# Altium PCB Surf_RF_transceiver.PcbDoc
Units mil, origin at the board's own origin, x right, y up, seen from the top; angles counter-clockwise.
Board outline 1968.5 x 1968.5 mil, 2 copper layers (Top Layer, Bottom Layer), stack 65.792 mil thick; 76 components, 52 nets, 286 pads, 87 vias.
Unrouted connection lines stored in the file: 15.
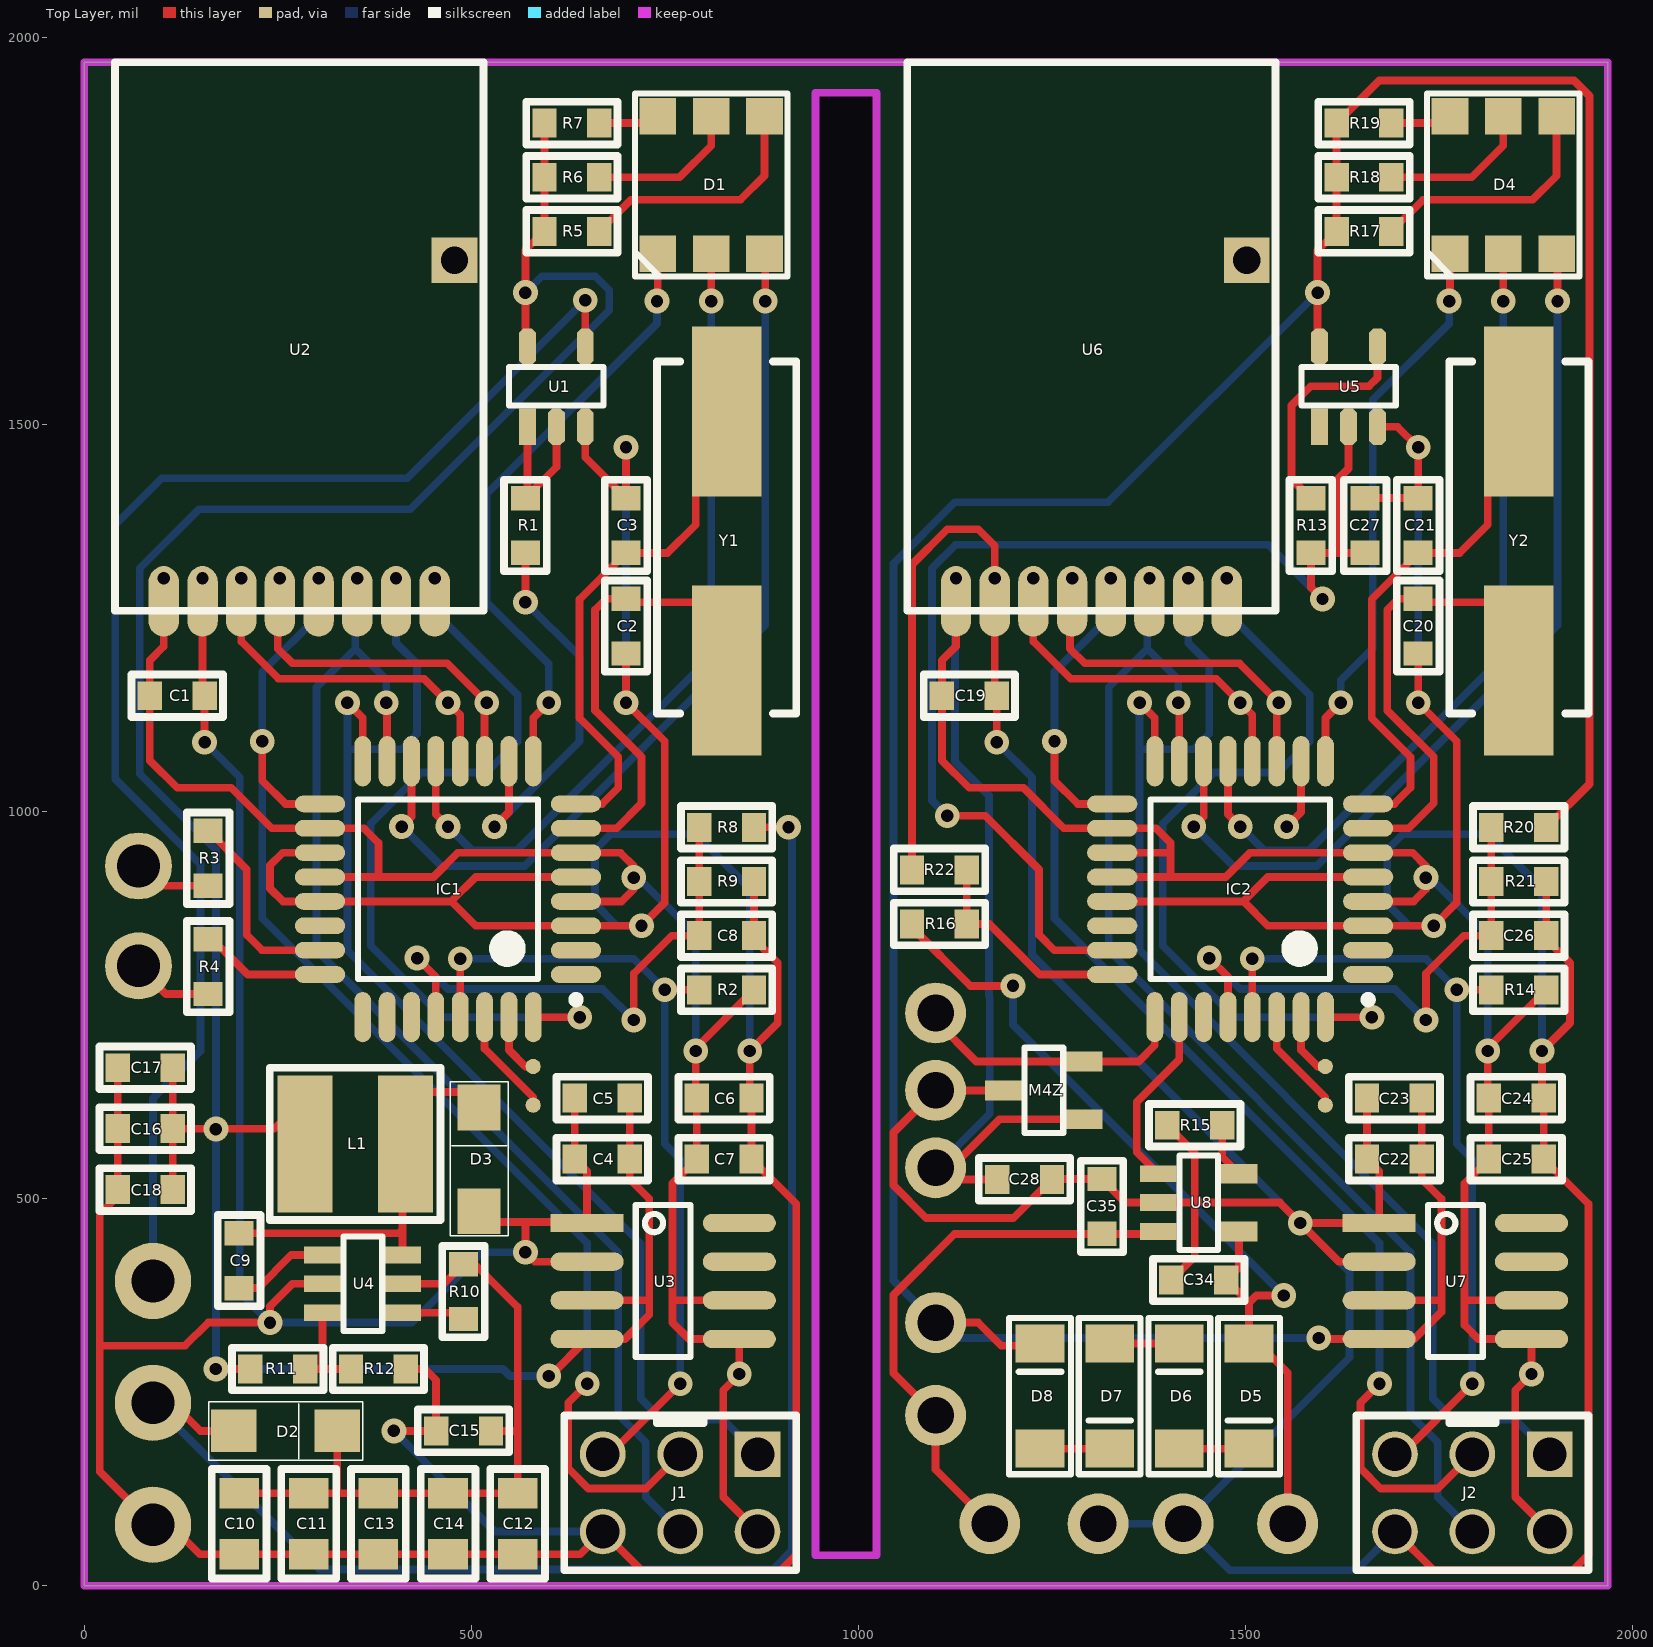
[diagram p0: Top Layer view]
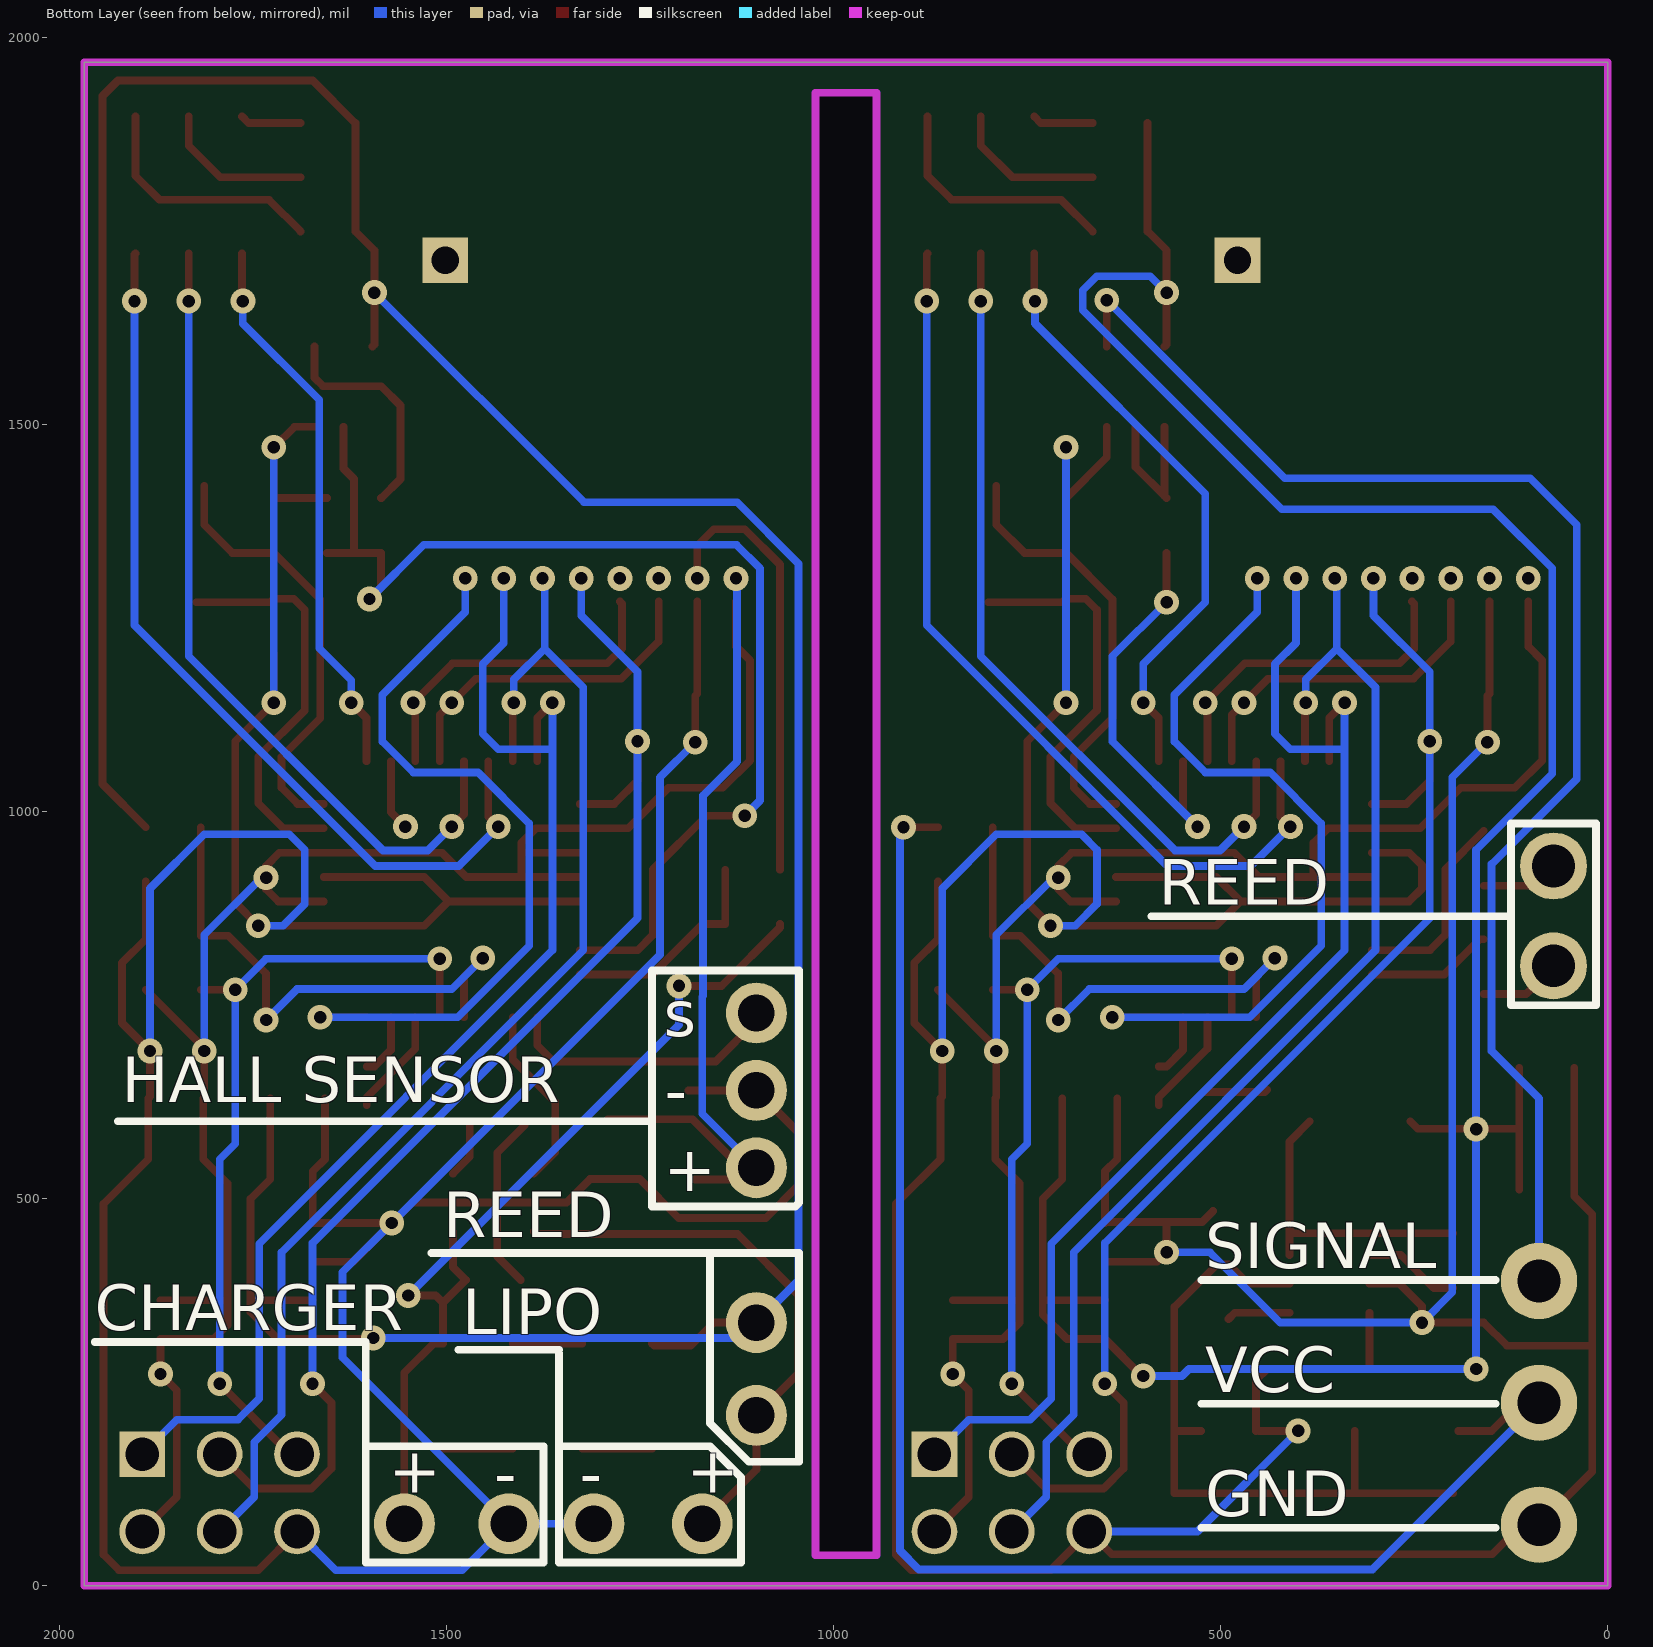
[diagram p1: Bottom Layer view, seen from below]
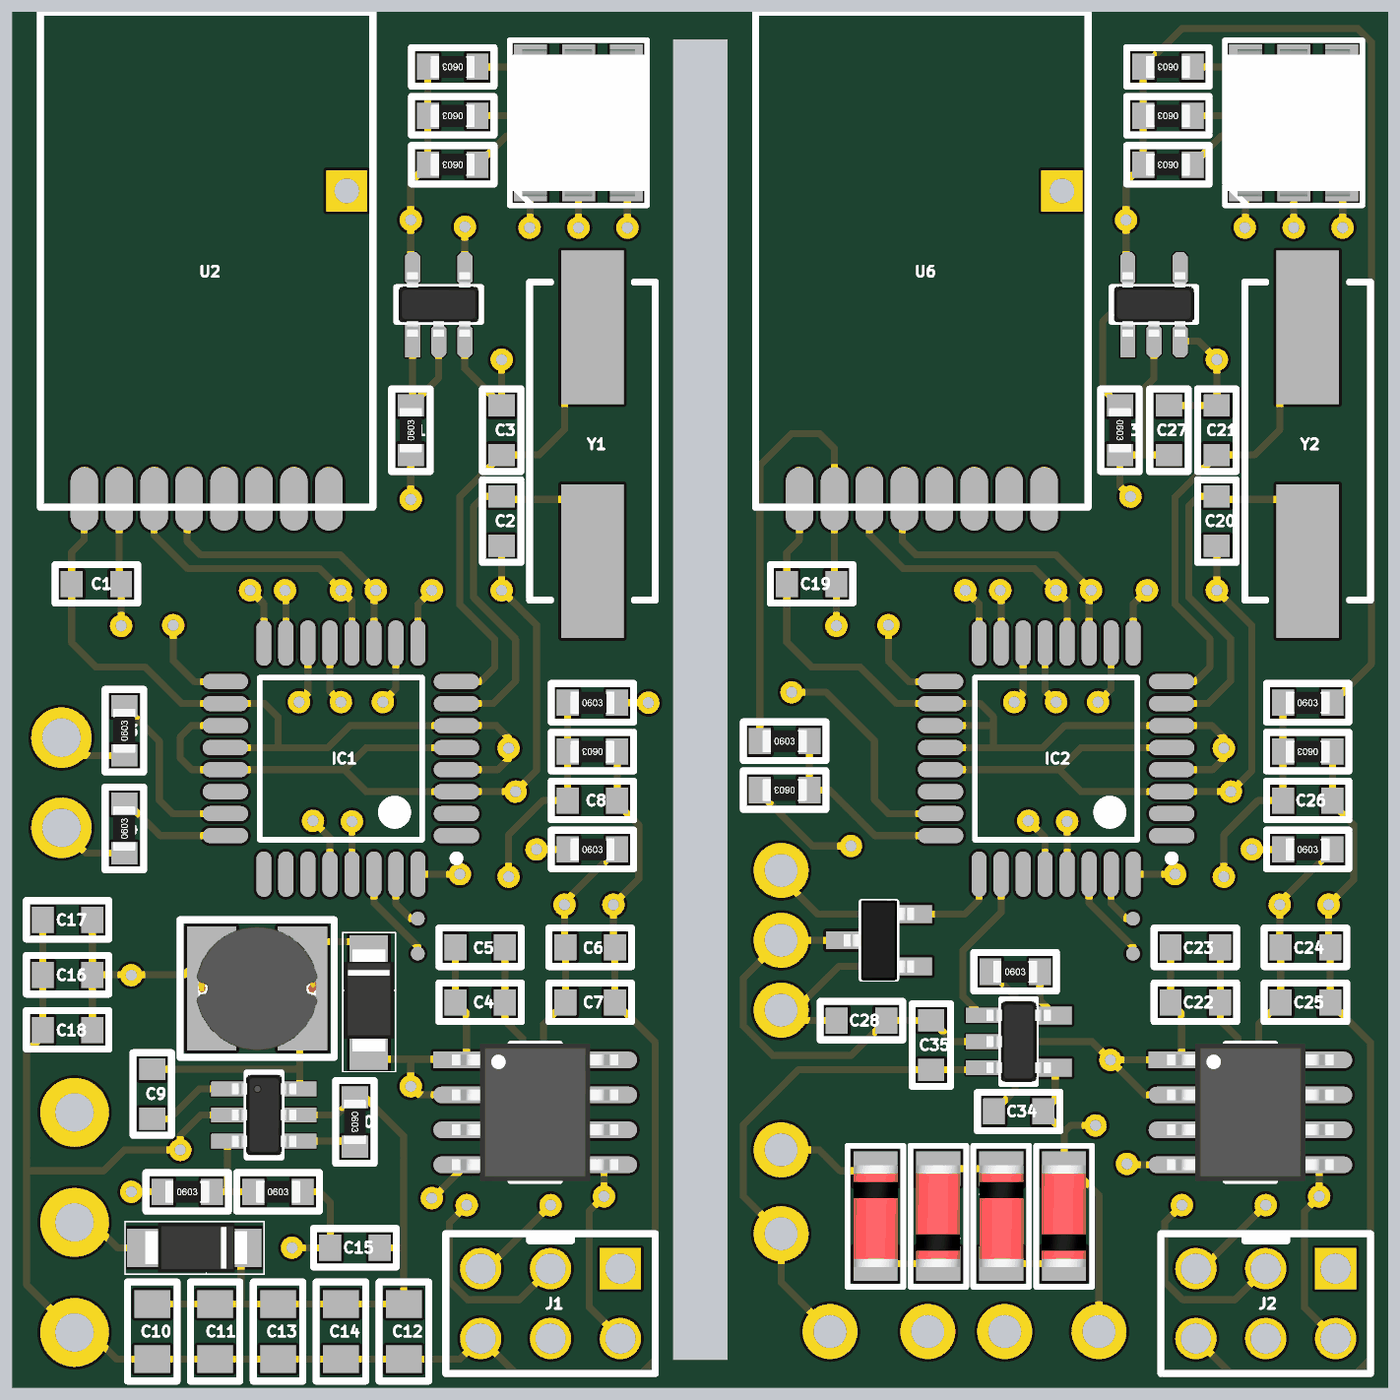
[diagram p2: 3D render of the assembled board from above, using the file's embedded part models]

## Layer stack, top to bottom
Top Layer: signal copper 1.4
Dielectric: core 62.9921, FR-4, Dk 4.8
Bottom Layer: signal copper 1.4

## Board outline
0,0 0,1968.5 1968.5,1968.5 1968.5,0
cut-out: 1023.62,1929.13 944.88,1929.13 944.88,39.37 1023.62,39.37

## Design rules (kind name [scope] priority, off if disabled: settings)
Clearance [All] p1: gap=10
PolygonConnect [All] p1: connectstyle=Relief reliefconductorwidth=10 reliefentries=4 polygonreliefangle="90 Angle"
RoutingVias [All] p1: holewidth=28 width=50 viastyle="Through Hole" minholewidth=28 minwidth=50 maxholewidth=28 maxwidth=50
SilkToSilkClearance [All] p1: silktosilkclearance=0
SilkscreenOverComponentPads [All] p1: minsilkscreentomaskgap=0
SolderMaskExpansion [All] p1: expansion=4
Width [All] p1: maxlimit=10 minlimit=10 preferedwidth=10
26 further rules are at their usual default settings.

## Classes and differential pairs
component class Transmitter: C19 C20 C21 C22 C23 C24 C25 C26 C27 C28 C34 C35 D4 D5 D6 D7 D8 IC2 J2 M4Z R13 R14 R15 R16 R17 R18 R19 R20 R21 R22 U5 U6 U7 U8 Y2
component class Receiver: C1 C2 C3 C4 C5 C6 C7 C8 C9 C10 C11 C12 C13 C14 C15 C16 C17 C18 D1 D2 D3 IC1 J1 L1 R1 R2 R3 R4 R5 R6 R7 R8 R9 R10 R11 R12 U1 U2 U3 U4 Y1

## Components (designator, comment, footprint, x,y, rotation, side; value= is the part's Value field where it differs from the comment)
C1 "10uF" FP_0603_CAP_080 120,1150 r180 top
C2 "22p" FP_0603_CAP_080 700,1240 r90 top
C3 "22p" FP_0603_CAP_080 700,1370 r270 top
C4 "1uF" FP_0603_CAP_080 669.29,551.18 r0 top
C5 "100nF" FP_0603_CAP_080 669.3,629.92 r0 top
C6 "2.2nF" FP_0603_CAP_080 826.78,629.92 r180 top
C7 "10uF" FP_0603_CAP_080 826.77,551.18 r180 top
C8 "100nF" FP_0603_CAP_080 830,840 r0 top
C9 "100nF" FP_0603_CAP_080 200,420 r270 top
C10 "1uF" FP_0805_CAP_145 200,80 r90 top
C11 "1uF" FP_0805_CAP_145 290,80 r90 top
C12 "1uF" FP_0805_CAP_145 560,80 r90 top
C13 "1uF" FP_0805_CAP_145 380,80 r90 top
C14 "1uF" FP_0805_CAP_145 470,80 r90 top
C15 "100nF" FP_0603_CAP_080 490,200 r180 top
C16 "10uF" FP_0603_CAP_080 78.74,590.55 r0 top
C17 "10uF" FP_0603_CAP_080 78.74,669.29 r0 top
C18 "100nF" FP_0603_CAP_080 78.74,511.81 r180 top
C19 "10uF" FP_0603_CAP_080 1143.62,1150 r180 top
C20 "22p" FP_0603_CAP_080 1723.62,1240 r90 top
C21 "22p" FP_0603_CAP_080 1723.62,1370 r270 top
C22 "1uF" FP_0603_CAP_080 1692.91,551.18 r0 top
C23 "100nF" FP_0603_CAP_080 1692.92,629.92 r0 top
C24 "2.2nF" FP_0603_CAP_080 1850.4,629.92 r180 top
C25 "10uF" FP_0603_CAP_080 1850.39,551.18 r180 top
C26 "100nF" FP_0603_CAP_080 1853.62,840 r0 top
C27 "10nF" FP_0603_CAP_080 1655,1370 r270 top
C28 "100nF" FP_0603_CAP_080 1215,525 r180 top
C34 "10uF" FP_0603_CAP_080 1440,395 r0 top
C35 "10uF" FP_0603_CAP_080 1315,490 r270 top
D1 "RGB" RGB_LED_5.0x5.0mm 810,1800 r270 top
D2 "S1ML" subsma 260,200 r270 top
D3 "SS26L" subsma 510,550.94 r0 top
D4 "RGB" RGB_LED_5.0x5.0mm 1833.62,1800 r270 top
D5 "1N4148" SOD-80 1505,245 r180 top
D6 "1N4148" SOD-80 1415,245 r0 top
D7 "1N4148" SOD-80 1325,245 r180 top
D8 "1N4148" SOD-80 1235,245 r0 top
IC1 "ATmega328" TQFP32_N 470,900 r180 top
IC2 "ATmega328" TQFP32_N 1493.62,900 r180 top
J1 "ISP" AVR_ISP 870,170 r180 top
J2 "ISP" AVR_ISP 1893.62,170 r180 top
L1 "18uH" SDR0403_IND_4.5x5mm 350,570.94 r270 top
M4Z "A1324LLHLX-T" Sensoe_hall_SOT23 1240,640 r0 top
R1 "1K" FP_0603_RES 570,1370 r90 top
R2 "10k" FP_0603_RES 830,770 r0 top
R3 "10k" FP_0603_RES 160,940 r90 top
R4 "10k" FP_0603_RES 160,800 r90 top
R5 "560R" FP_0603_RES 630,1750 r180 top
R6 "560R" FP_0603_RES 630,1820 r180 top
R7 "560R" FP_0603_RES 630,1890 r180 top
R8 "10k" FP_0603_RES 830,980 r0 top
R9 "10k" FP_0603_RES 830,910 r180 top
R10 "82k" FP_0603_RES 490,380 r270 top
R11 "5k1" FP_0603_RES 250,280 r0 top
R12 "1k" FP_0603_RES 380,280 r0 top
R13 "47k" FP_0603_RES 1585,1370 r270 top
R14 "10k" FP_0603_RES 1853.62,770 r0 top
R15 "10k" FP_0603_RES 1435,595 r0 top
R16 "10k" FP_0603_RES 1105,855 r180 top
R17 "560R" FP_0603_RES 1653.62,1750 r180 top
R18 "560R" FP_0603_RES 1653.62,1820 r180 top
R19 "560R" FP_0603_RES 1653.62,1890 r180 top
R20 "10k" FP_0603_RES 1853.62,980 r0 top
R21 "10k" FP_0603_RES 1853.62,910 r180 top
R22 "10k" FP_0603_RES 1105,925 r0 top
U1 "SN74AHC1G08" GATE_SOT23-5 610,1550 r90 top
U2 "NRF24L01" NRF24L01_SMD 39.37,1259.84 r0 top
U3 "TPS77733D" DIGITAL_SOIC8 748.03,393.7 r0 top
U4 "MP2459" Supply_SOT23-6 360,390 r0 top
U5 "74AHC1G14" GATE_SOT23-5 1633.62,1550 r90 top
U6 "NRF24L01" NRF24L01_SMD 1062.99,1259.84 r0 top
U7 "TPS77733D" DIGITAL_SOIC8 1771.65,393.7 r0 top
U8 "MCP73831" SUPPLY_SOT23-5 1440,495 r0 top
Y1 "16MHz" FP_CRYSTAL_HC49_SMD 830,1350 r270 top
Y2 "16MHz" FP_CRYSTAL_HC49_SMD 1853.62,1350 r270 top

## Footprints (in the part's own frame and the unit in brackets; to place one, negate y for a bottom-side part, rotate by r counter-clockwise, add the part's x,y. Pads: shape width x height; smd on the part's side, far side on the other; paste and mask are expansions set on the pad)
AVR_ISP [mm] "2×3 tüskesor"
  rect 1.5x1.5 hole 1.1: 1(0,0)
  round 1.5 hole 1.1: 2(0,2.54) 3(2.54,0) 4(2.54,2.54) 5(5.08,0) 6(5.08,2.54)
  silkscreen extent -1.27,-1.27 6.35,3.81, body extent -1.27,-1.27 6.35,3.81, height 8.54
DIGITAL_SOIC8 [mm]
  rect 2.4x0.6 smd: 1(-2.5,1.905)
  oval 2.4x0.6 smd: 2(-2.5,0.635) 3(-2.5,-0.635) 4(-2.5,-1.905) 5(2.5,-1.905) 6(2.5,-0.635) 7(2.5,0.635) 8(2.5,1.905)
  silkscreen extent -0.9,-2.5 0.9,2.5, body extent -3.03,-2.5 3.03,2.5, height 1.9
FP_0603_CAP_080 [mm] "0.8mm magas 0603 kapacitás"
  rect 0.8x0.95 smd: 1(-0.9,0) 2(0.9,0)
  silkscreen extent -1.5,-0.7 1.5,0.7, body extent -0.8,-0.4 0.76,0.4, height 0.8
FP_0603_RES [mm] "0603 ellenállás"
  rect 0.8x0.95 smd: 1(-0.9,0) 2(0.9,0)
  silkscreen extent -1.5,-0.7 1.5,0.7, body extent -0.8,-0.4 0.8,0.4, height 0.44
FP_0805_CAP_145 [mm] "0805 kapacitás NIC 1.45 mm magas"
  rect 1x1.3 smd: 1(-1,0) 2(1,0)
  silkscreen extent -1.8,-0.9 1.8,0.9, body extent -1,-0.64 1.03,0.64, height 1.45
FP_CRYSTAL_HC49_SMD [mil] "HC49/SMD"
  rect 220x90 smd: 1(-167.32,0) 2(167.32,0)
  silkscreen extent -232,-90 223,90, body extent -249,-90 240,90, height 130
GATE_SOT23-5 [mm] "SOT23, 5-Leads, Body 2.9x1.6mm, Pitch 0.95mm, Lead Span 2.8mm, IPC Medium Density"
  rect 1.2x0.55 smd mask+0.05: 1(-1.327,0.95)
  oct 1.2x0.55 smd mask+0.05: 2(-1.327,0) 3(-1.327,-0.95) 4(1.3,-0.95) 5(1.3,0.95)
  silkscreen extent -0.63,-1.55 0.64,1.55, body extent -1.17,-1.46 1.17,1.46, height 1
NRF24L01_SMD [mm]
  oval 1x2.3 smd: 1(1.61,0.3) 2(2.88,0.3) 3(4.15,0.3) 4(5.42,0.3) 5(6.69,0.3) 6(7.96,0.3) 7(9.23,0.3) 8(10.5,0.3)
  rect 1.5x1.5 hole 0.9: 9(11.15,11.5)
  silkscreen extent 0.01,0 12.1,18, body extent 0,0 12.06,18.01, height 1.8
RGB_LED_5.0x5.0mm [mm]
  rect 1.2x1.2 smd: AB(-2.504,-1.75) AG(-2.504,0) AR(-2.504,1.75) KB(1.996,-1.75) KG(1.996,0) KR(1.996,1.75)
  silkscreen extent -3.25,-2.5 2.75,2.5, body extent -2.93,-2.48 2.42,2.47, height 1.7
SDR0403_IND_4.5x5mm [mm]
  rect 4.5x1.8 smd: 1(0,1.65) 2(0,-1.65)
  silkscreen extent -2.5,-2.8 2.5,2.8, body extent -2.25,-2.2 2.25,2.2, height 3.25
Sensoe_hall_SOT23 [mm] "SOT23-3 tok"
  rect 1.2x0.65 smd: +(1.327,-0.95) -(-1.327,0) o(1.327,0.95)
  silkscreen extent -0.64,-1.4 0.64,1.4, body extent -1.27,-1.46 1.27,1.46, height 0.97
SOD-80 [mm]
  rect 1.6x1.25 smd: A(0,-1.725) K(0,1.725)
  silkscreen extent -1.02,-2.57 1.02,2.57, body extent -0.79,-1.85 0.81,1.85, height 1.61
subsma [mm] "nagyfesz egyeniranyito"
  rect 1.4x1.5 smd: A(0,-1.7) K(0,1.7)
  silkscreen extent -0.95,-2.51 0.97,2.54, body extent -0.9,-1.77 0.9,1.93, height 1.35
SUPPLY_SOT23-5 [mm] "SOT23, 5-Leads, Body 2.9x1.6mm, Pitch 0.95mm, Lead Span 2.8mm, IPC Medium Density"
  rect 1.2x0.55 smd mask+0.05: 1(-1.327,0.95) 2(-1.327,0) 3(-1.327,-0.95)
  rect 1.2x0.65 smd: 4(1.327,-0.95) 5(1.327,0.95)
  silkscreen extent -0.64,-1.55 0.64,1.55, body extent -1.17,-1.46 1.17,1.46, height 1
Supply_SOT23-6 [mm] "SOT23, 5-Leads, Body 2.9x1.6mm, Pitch 0.95mm, Lead Span 2.8mm, IPC Medium Density"
  rect 1.2x0.55 smd mask+0.05: 1(-1.327,0.95) 2(-1.327,0) 3(-1.327,-0.95) 4(1.3,-0.95) 5(1.3,0) 6(1.3,0.95)
  silkscreen extent -0.64,-1.55 0.64,1.55, body extent -1.17,-1.46 1.17,1.46, height 1
TQFP32_N [mm] "Thin QFP, 32-Leads, Body 7x7mm, Pitch 0.8mm, IPC Medium Density"
  oval 1.65x0.55 smd: 1(-4.2,2.8) 2(-4.2,2) 3(-4.2,1.2) 4(-4.2,0.4) 5(-4.2,-0.4) 6(-4.2,-1.2) 7(-4.2,-2) 8(-4.2,-2.8) 17(4.2,-2.8) 18(4.2,-2) 19(4.2,-1.2) 20(4.2,-0.4) 21(4.2,0.4) 22(4.2,1.2) 23(4.2,2) 24(4.2,2.8)
  oval 0.55x1.65 smd: 9(-2.8,-4.2) 10(-2,-4.2) 11(-1.2,-4.2) 12(-0.4,-4.2) 13(0.4,-4.2) 14(1.2,-4.2) 15(2,-4.2) 16(2.8,-4.2) 25(2.8,4.2) 26(2,4.2) 27(1.2,4.2) 28(0.4,4.2) 29(-0.4,4.2) 30(-1.2,4.2) 31(-2,4.2) 32(-2.8,4.2)
  silkscreen extent -4.33,-2.95 2.95,3.75, body extent -3.5,-3.5 3.5,3.5, height 1.2

## Part data
C1 C2 C3 C4 C5 C6 C7 C8 C9 C15 C16 C17 C18 C19 C20 C21 C22 C23 C24 C25 C26 C27 C28 C34 C35: library part Cap, "Capacitor"
C10 C11 C12 C13 C14: library part CAP, "Capacitor"
D1 D4: library part LED_RGB_6_PIN, "LED_RGB_6_PIN"
D2: library part DIODE, "Diode"
D3: library part SCHOTTKY, "NXP - PMEG3020EJ,115 - SCHOTTKY RECT 30V 2A SOD323F"
D5 D6 D7 D8: library part DIODE_big, "Diode 1N4148 SMD"
J1 J2: "Programozó csatlakozó"
L1: library part L, "Inductor"
M4Z: library part A3122EUA, "Hall-Effect Switch for High-Temperature Operation"
R1 R10: library part RES, "Resistor"
R2 R3 R4 R5 R6 R7 R8 R9 R11 R12 R13 R14 R15 R16 R17 R18 R19 R20 R21 R22: library part Res3, "Resistor"
U1: "1x2-INPUT AND-GATE"
U2 U6: "2.4Ghz RF module"
U3 U7: "LDO Voltage Regulators Fast-Tran-Res 750-mA"
U4: "0.5A, 55V, 480kHz  Step-Down Converter in a TSOT23-6"
U5: "SCHMITT-TRIGGER INVERTER"
U8: "MCP73831 SOT23-5 Li-on batt charger"
Y1 Y2: library part "XTAL HC49", "Standard HC49 quartz"

## Free pads (board coordinates)
  round 19.68 smd: 0(580,620.94) 0(1603.62,620.94) 1(580,670.94) 1(1603.62,670.94)
  round 98.43 hole 55.12: 1(88.74,78.74) 2(88.74,236.22) 3(88.74,393.7)
  round 78.74 hole 47.24: 1(1100,220) 1(1100,340) 1(1100,540) 1(1100,640) 1(1100,740) 1(1170,80) 1(1310,80) 1(1420,80) 1(1555,80)
  round 86.61 hole 55.12: 3(70,800.94) 3(70,930)

## Via types
v1: diameter 32, hole 16, Top Layer to Bottom Layer, 87 vias

## Nets (pads, with @x,y where several pads share a name; then routed paths per layer and width w, separated by ;. In a path a pad name is that pad's centre, name@x,y a point inside that pad or via, vN(x,y) a via of type N, cw(c..) or ccw(c..) an arc to the next point about the centre after c; other vN are vias at no path point)
3V3: C1.2 C6.2 C7.2 C19.2 C24.2 C25.2 C28.2 IC1.4 IC1.6 IC1.18 IC1.20 IC2.4 IC2.6 IC2.18 IC2.19 IC2.20 J1.2 J2.2 M4Z.+ pad.1@1100,540 R2.2 R14.2 U2.1 U3.5 U3.6 U6.1 U7.5 U7.6 | length 5845.3
  Top Layer w10: U2.1 102.76,1213.7 84.57,1195.51 C1.2 84.57,1066.38 120,1030.94 190,1030.94 242.2,978.74 IC1.18 361.26,978.74 380,960 380,915.75 ; IC1.20 380,915.75 ; IC1.4 694.25,884.25 710,900 v1(710,915) 710,930 692.76,947.24 IC1.6 482.76,947.24 451.26,915.75 380,915.75 ; U3.6 761.3,368.7 760,370 ; R2.2 790,694.57 v1(790,690.94) 790,631.27 C6.2 C7.2 760,519.84 760,370 ; J1.2 825.47,114.53 825.47,252.56 v1(846.46,273.54) U3.5 781.3,318.7 760,340 760,370 ; U6.1 1126.38,1213.7 1108.19,1195.51 C19.2 1108.19,1066.38 1143.62,1030.94 1213.62,1030.94 1265.83,978.74 IC2.18 1384.88,978.74 1403.62,960 1403.62,945 ; C28.2 1115,525 1100,540 1120,540 1182.6,602.6 M4Z.+ ; IC2.20 1403.62,915.75 ; IC2.19 1401.38,947.24 1403.62,945 ; IC2.4 1717.87,884.25 1733.62,900 v1(1733.62,915) 1733.62,930 1716.38,947.24 IC2.6 1506.38,947.24 1474.88,915.75 1403.62,915.75 ; U7.6 1784.92,368.7 1783.62,370 ; R14.2 1813.62,694.57 v1(1813.62,690.94) 1813.62,631.27 C24.2 C25.2 1783.62,519.84 1783.62,370 ; J2.2 1849.09,114.53 1849.09,252.56 v1(1870.08,273.54) U7.5 1801.3,318.7 1783.62,336.38 1783.62,370 ; 1403.62,915.75 1403.62,945
  Bottom Layer w10: v1(710,915) 715.94,915 790,840.94 v1(790,690.94) ; pad.1@1100,540 1170,610 1170,761.16 1169,762.16 1169,1021 1125,1065 v1@1125,1301.65 ; v1(1733.62,915) 1739.57,915 1813.62,840.94 v1(1813.62,690.94)
  other v1: 102.76,1301.65 1126.38,1301.65
4.2V: C22.2 C23.2 D8.K pad.1@1100,340 R17.2 R18.2 R19.2 R20.2 U5.5 U7.3 U7.4 | length 4515.1
  Top Layer w10: pad.1@1100,340 1155,340 1185,310 1232.09,310 D8.K ; v1(1595,320) 1596.3,318.7 U7.4 1718.7,318.7 1753.62,353.62 1753.62,400 1753.62,500 1728.35,525.28 C22.2 C23.2 ; U5.5 1593.62,1603.78 v1(1593.62,1670.94) 1593.62,1725.43 R17.2 R18.2 R19.2 1673.19,1945 1925,1945 1945,1925 1945,1035.94 R20.2 ; U7.3 1753.62,368.7
  Bottom Layer w10: v1(1593.62,1670.94) 1322.68,1400 1125,1400 1045.63,1320.63 1045.63,394.37 1100,340 1120,320 v1(1595,320)
5V: C4.2 C5.2 C16.2 C17.2 C18.1 L1.2 R5.2 R6.2 R7.2 R11.1 U1.5 U3.3 U3.4 | length 3585.2
  Top Layer w10: C18.1 C17.2 ; C16.2 245.59,590.55 L1.2@255.04,600 ; v1(170,280) R11.1 ; U1.5 570,1603.78 v1(570,1670.94) 570,1725.43 R5.2 R6.2 R7.2 ; v1(600,270.94) 601.85,270.94 U3.4 698.7,318.7 730,350 730,370 ; U3.3 728.7,368.7 730,370 ; C5.2 C4.2 704.72,525.28 730,500 730,370
  Bottom Layer w10: v1(570,1670.94) 591.24,1692.18 660.24,1692.18 678.4,1674.02 678.4,1648.34 421.01,1390.94 148.21,1390.94 71.76,1314.49 71.76,1049.19 170,950.94 v1(170,590) v1(170,280) 540.94,280 550,270.94 v1(600,270.94)
BLUE: D1.KB D4.KB IC1.9 IC2.9 | length 1511.7
  Top Layer w10: IC1.9 580.24,1121.18 v1(600,1140.94) ; v1(740,1660) 741.1,1661.1 D1.KB ; IC2.9 1603.86,1121.18 v1(1623.62,1140.94) ; v1(1763.62,1660) 1764.72,1661.1 D4.KB
  Bottom Layer w10: v1(600,1140.94) 600,1190.94 520,1270.94 520,1410.94 740,1630.94 v1(740,1660) ; v1(1623.62,1140.94) 1623.62,1170 1665,1211.38 1665,1532.32 1763.62,1630.94 v1(1763.62,1660)
CE: IC1.12 IC2.12 U2.3 U6.3 | length 867.3
  Top Layer w10: U2.3 202.76,1220.19 251,1171.94 439,1171.94 v1(470,1140.94) 485.75,1125.2 IC1.12 ; U6.3 1226.38,1220.19 1274.62,1171.94 1462.62,1171.94 v1(1493.62,1140.94) 1509.37,1125.2 IC2.12
  other v1: 202.76,1301.65 1226.38,1301.65
CH_AVAILABLE: IC2.24 R16.1 R22.2 | length 284.9
  Top Layer w10: R22.2 R16.1 1169.57,855 1234.8,789.76 IC2.24
CHARGER: C34.2 D5.A pad.1@1555,80 R16.2 U8.4 | length 1184.8
  Top Layer w10: R16.2 1069.57,850.43 1145,775 v1(1200,775) ; U8.4 1492.24,411.81 C34.2 1505,365.43 ; v1(1550,375) 1514.57,375 1505,365.43 ; pad.1@1555,80 1555,275 1517.09,312.91 D5.A 1505,365.43
  Bottom Layer w10: v1(1200,775) 1200,725 v1(1550,375)
CS: IC1.11 IC2.11 U2.4 U6.4 | length 875.2
  Top Layer w10: U2.4 250,1268.9 250,1210.94 269,1191.94 469,1191.94 v1(520,1140.94) 517.24,1138.19 IC1.11 ; U6.4 1273.62,1268.9 1273.62,1210.94 1292.62,1191.94 1492.62,1191.94 v1(1543.62,1140.94) 1540.87,1138.19 IC2.11
  other v1: 252.76,1301.65 1276.38,1301.65
GND: C1.1 C2.1 C3.1 C4.1 C5.1 C6.1 C7.1 C8.2 C10.1 C11.1 C12.1 C13.1 C14.1 C15.2 C16.1 C17.1 C18.2 C19.1 C20.1 C21.1 C22.1 C23.1 C24.1 C25.1 C26.2 C27.1 C28.1 C34.1 C35.1 D3.A IC1.3 IC1.5 IC1.19 IC1.21 IC2.3 IC2.5 IC2.21 J1.6 J2.6 M4Z.- pad.1@88.74,78.74 pad.1@1100,640 pad.1@1310,80 pad.1@1420,80 R9.1 R12.2 R15.1 R21.1 R22.1 U1.3 U2.2 U3.1 U3.2 U4.2 U5.3 U6.2 U7.1 U7.2 U8.2 | length 14512.9
  Top Layer w10: C17.1 C18.2 43.31,503.31 20,480 20,310 ; U2.2 152.76,1152.68 C1.1 v1(155.43,1090) ; v1@230,340 160,340 130,310 20,310 ; v1(240,340) 240,360.94 269.06,390 U4.2 ; IC1.19 256.3,947.24 240,930.94 240,900.94 256.69,884.25 IC1.21 474.25,884.25 ; v1(400,200) C15.2@450,200 ; R12.2 440,280 454.57,265.43 C15.2 ; D3.A 524.02,470 570,470 ; C5.1 C4.1 649.61,535.43 U3.1 648.31,470 570,470 ; IC1.5 505.75,915.75 474.25,884.25 ; U1.3 647.4,1458.03 C3.1 v1(700,1470.94) ; U3.2 582.24,418.7 v1(570,430.94) 570,470 ; C2.1 v1(700,1140.94) 750,1090.94 750,882.76 v1(720,852.76) IC1.3 505.75,852.76 474.25,884.25 ; R9.1 C8.2 865.43,835.51 896.18,804.76 896.18,727.13 v1(860,690.94) 860,632.13 C6.1 C7.1 920,493.39 920,40 900,20 720,20 J1.6 640.63,40.63 C12.1 C14.1 C13.1 C11.1 C10.1 149.37,40.63 111.26,78.74 88.74,78.74 20,147.48 20,310 ; R22.1 1069.57,1319.57 1115,1365 1155,1365 1176.38,1343.62 v1(1176.38,1301.65) ; U6.2 1176.38,1152.68 C19.1 v1(1179.06,1090) ; M4Z.- 1100,640 1045.63,585.63 1045.63,517.48 1088.11,475 1200.43,475 C28.1 1250.87,525.43 C35.1 1345.43,495 U8.2 1435,495 ; IC2.21 1497.87,884.25 ; R15.1 1435,559.57 1435,495 ; C34.1 1435,425.43 1435,495 ; C27.1 C21.1 v1(1723.62,1470.94) 1696.81,1497.76 U5.3 ; C23.1 C22.1 1673.23,535.43 U7.1 v1(1571.3,468.7) ; IC2.5 1529.37,915.75 1497.87,884.25 ; U7.2 1621.3,418.7 v1(1571.3,468.7) ; J2.6 1743.62,20 1923.62,20 1943.62,40 1943.62,493.39 C25.1 C24.1 1883.62,632.13 v1(1883.62,690.94) 1919.8,727.13 1919.8,804.76 1889.05,835.51 C26.2 R21.1 ; C20.1 v1(1723.62,1140.94) 1773.62,1090.94 1773.62,882.76 v1(1743.62,852.76) IC2.3 1529.37,852.76 1497.87,884.25 ; 1435,495 1545,495 v1(1571.3,468.7)
  Bottom Layer w10: pad.1@88.74,78.74 pad.1@97.48,70 ; v1(155.43,1090) 201,1044.43 201,379 v1(240,340) 423.07,340 514.02,430.94 v1(570,430.94) ; v1(400,200) 530,70 J1.6 ; v1(700,1140.94) v1(700,1470.94) ; v1(720,852.76) 688.19,852.76 660,880.94 660,950.94 680,970.94 790,970.94 860,900.94 v1(860,690.94) ; v1(1179.06,1090) 1224.62,1044.43 1224.62,815.38 v1(1571.3,468.7) v1@1573.35,466.65 ; pad.1@1310,80 pad.1@1420,80 ; v1@1576.69,470 v1@1573.35,466.65 ; J2.6 1643.62,20 1480,20 pad.1@1420,80 ; v1(1723.62,1140.94) v1(1723.62,1470.94) ; v1(1743.62,852.76) 1711.81,852.76 1683.62,880.94 1683.62,950.94 1703.62,970.94 1813.62,970.94 1883.62,900.94 v1(1883.62,690.94) ; pad.1@1420,80 1635,295 1635,405 v1@1573.35,466.65
  other v1: 152.76,1301.65
GREEN: D1.KG D4.KG IC1.13 IC2.13 | length 2136.4
  Top Layer w10: IC1.13 454.25,996.69 v1(470,980.94) ; v1(810,1660) D1.KG ; IC2.13 1477.87,996.69 v1(1493.62,980.94) ; v1(1833.62,1660) D4.KG
  Bottom Layer w10: v1(470,980.94) 501,949.94 559,949.94 810,1200.94 v1(810,1660) ; v1(1493.62,980.94) 1524.62,949.94 1582.62,949.94 1833.62,1200.94 v1(1833.62,1660)
HALL: IC2.25 M4Z.o pad.1@1100,740 | length 360.1
  Top Layer w10: pad.1@1100,740 1100,730 1152.6,677.4 M4Z.o 1362.4,677.4 1383.39,698.39 IC2.25
IRQ: IC1.32 IC2.32 U2.8 U6.8 | length 2030.6
  Top Layer w10: IC1.32 v1(640.24,734.65) ; IC2.32 v1(1663.86,734.65)
  Bottom Layer w10: v1(452.76,1301.65) 452.76,1258.19 560,1150.94 560,1090.94 520,1050.94 436.16,1050.94 370,984.79 370,827.1 462.46,734.65 v1(640.24,734.65) ; v1(1476.38,1301.65) 1476.38,1258.19 1583.62,1150.94 1583.62,1090.94 1543.62,1050.94 1459.78,1050.94 1393.62,984.79 1393.62,827.1 1486.08,734.65 v1(1663.86,734.65)
LI-PO: C35.2 pad.1@1100,220 pad.1@1170,80 U8.3 | length 723.2
  Top Layer w10: pad.1@1170,80 1100,150 1100,220 1045.63,274.37 1045.63,375.63 1124.57,454.57 C35.2 1384.72,454.57 U8.3
MISO: IC1.16 IC2.16 J1.1 J2.1 U2.7 U6.7 | length 3261.7
  Top Layer w10: v1(340,1140.94) 359.76,1121.18 IC1.16 ; v1(1363.62,1140.94) 1383.39,1121.18 IC2.16
  Bottom Layer w10: v1(340,1140.94) 340,1080.94 ; v1(402.76,1301.65) 402.76,1218.19 430,1190.94 430,1100.94 410,1080.94 340,1080.94 ; J1.1 825.47,214.53 746.42,214.53 719,241.94 719,441.94 340,820.94 340,1080.94 ; v1(1363.62,1140.94) 1363.62,1080.94 ; v1(1426.38,1301.65) 1426.38,1218.19 1453.62,1190.94 1453.62,1100.94 1433.62,1080.94 1363.62,1080.94 ; J2.1 1849.09,214.53 1770.04,214.53 1742.62,241.94 1742.62,441.94 1363.62,820.94 1363.62,1080.94
MOSI: IC1.15 IC2.15 J1.4 J2.4 U2.6 U6.6 | length 3218
  Top Layer w10: v1(390,1140.94) 391.26,1139.69 IC1.15 ; v1(1413.62,1140.94) 1414.88,1139.69 IC2.15
  Bottom Layer w10: v1@350,1300.94 350,1210.94 ; v1(390,1140.94) 390,1170.94 350,1210.94 ; J1.4 725.47,114.53 725.47,185.47 690,220.94 690,430.94 300,820.94 300,1160.94 350,1210.94 ; v1@1373.62,1300.94 1373.62,1210.94 ; v1(1413.62,1140.94) 1413.62,1170.94 1373.62,1210.94 ; J2.4 1749.09,114.53 1749.09,185.47 1713.62,220.94 1713.62,430.94 1323.62,820.94 1323.62,1160.94 1373.62,1210.94
  other v1: 352.76,1301.65 1376.38,1301.65
NetC2_2: C2.2 IC1.7 Y1.2 | length 520.7
  Top Layer w10: IC1.7 687.8,978.74 720,1010.94 720,1070.94 660,1130.94 660,1260.94 674.49,1275.43 C2.2 704.49,1270.94 Y1.2@800,1270.94
NetC3_2: C3.2 IC1.8 Y1.1 | length 567.5
  Top Layer w10: IC1.8 669.29,1010.24 690,1030.94 690,1070.94 640,1120.94 640,1274.57 C3.2 753.62,1334.57 790,1370.94 Y1.1@790,1420.94
NetC9_1: C9.1 D3.K L1.1 U4.6 | length 477.8
  Top Layer w10: C9.1 406.61,455.43 411.18,460 ; L1.1@384.96,600 411.18,573.78 411.18,460 ; U4.6 411.18,460 ; L1.1@440,640.94 443.07,637.87 D3.K@520,637.87
NetC9_2: C9.2 U4.1 | length 125.5
  Top Layer w10: C9.2 224.57,384.57 267.4,427.4 U4.1
NetC10_2: C10.2 C11.2 C12.2 C13.2 C14.2 C15.1 D2.K R10.1 U4.5 | length 899.4
  Top Layer w10: C10.2 C11.2 330,119.37 ; D2.K 326.93,122.44 330,119.37 ; U4.5 464.57,390 R10.1 504.57,415.43 560,360 560,200 ; C15.1 560,200 ; 330,119.37 C13.2 C14.2 C12.2 560,200
NetC20_2: C20.2 IC2.7 Y2.2 | length 520.7
  Top Layer w10: IC2.7 1711.42,978.74 1743.62,1010.94 1743.62,1070.94 1683.62,1130.94 1683.62,1260.94 1698.11,1275.43 C20.2 1728.11,1270.94 Y2.2@1823.62,1270.94
NetC21_2: C21.2 IC2.8 Y2.1 | length 567.5
  Top Layer w10: IC2.8 1692.91,1010.24 1713.62,1030.94 1713.62,1070.94 1663.62,1120.94 1663.62,1274.57 C21.2 1777.24,1334.57 1813.62,1370.94 Y2.1@1813.62,1420.94
NetD1_AB: D1.AB R7.1 | length 79.2
  Top Layer w10: R7.1 732.52,1890 D1.AB
NetD1_AG: D1.AG R6.1 | length 199.2
  Top Layer w10: R6.1 769.06,1820 810,1860.94 D1.AG
NetD1_AR: D1.AR R5.1 | length 319.8
  Top Layer w10: R5.1 706.38,1790.94 847.8,1790.94 878.9,1822.05 D1.AR
NetD4_AB: D4.AB R19.1 | length 79.2
  Top Layer w10: R19.1 1756.14,1890 D4.AB
NetD4_AG: D4.AG R18.1 | length 199.2
  Top Layer w10: R18.1 1792.68,1820 1833.62,1860.94 D4.AG
NetD4_AR: D4.AR R17.1 | length 319.8
  Top Layer w10: R17.1 1730,1790.94 1871.42,1790.94 1902.52,1822.05 D4.AR
NetD5_K: D5.K D6.A | length 90
  Top Layer w10: D6.A D5.K
NetD6_K: D6.K D7.A | length 90
  Top Layer w10: D7.A D6.K
NetD7_K: D7.K D8.A | length 90
  Top Layer w10: D8.A D7.K
NetR1_2: R1.2 U1.1 U1.2 | length 198.6
  Top Layer w10: R1.2 R1.2@572.6,1408.03 ; U1.1 R1.2@572.6,1408.03 ; U1.2 610,1445.43 R1.2@572.6,1408.03
NetR10_2: R10.2 U4.4 | length 82.1
  Top Layer w10: U4.4 481.97,352.6 R10.2
NetR11_2: R11.2 R12.1 U4.3 | length 132.7
  Top Layer w10: R11.2 310,280 ; U4.3 307.76,282.24 310,280 ; R12.1 310,280
NetR13_1: R13.1 U5.4 | length 296.3
  Top Layer w10: R13.1 1584.57,1405.43 1560,1430 1560,1525 1585,1550 1660,1550 1671.02,1561.02 U5.4
NetR15_2: R15.2 U8.5 | length 71.6
  Top Layer w10: R15.2 1470.43,554.21 U8.5
PAIR_1: IC1.23 R3.2 | length 258
  Top Layer w10: R3.2 210,925.43 210,840.94 229.69,821.26 IC1.23
PAIR_2: IC1.24 R4.2 | length 163.6
  Top Layer w10: R4.2 165.51,835.43 211.18,789.76 IC1.24
RANDOM: C27.2 IC2.23 R13.2 U5.2 | length 1513.2
  Top Layer w10: v1(1115,995) 1164.06,995 1233.62,925.43 1233.62,840.94 1253.31,821.26 IC2.23 ; v1(1600,1275) 1585,1290 R13.2 1620,1334.57 ; U5.2 1633.62,1443.62 1620,1430 1620,1334.57 ; C27.2 1620,1334.57
  Bottom Layer w10: v1(1115,995) 1095.38,1014.62 1095.38,1314.49 1125.88,1345 1530,1345 v1(1600,1275)
RED: D1.KR D4.KR IC1.14 IC2.14 | length 2381.1
  Top Layer w10: v1(410,980.94) 422.76,993.7 IC1.14 ; D1.KR 880,1720.32 v1(880,1660) ; v1(1433.62,980.94) 1446.38,993.7 IC2.14 ; D4.KR 1903.62,1720.32 v1(1903.62,1660)
  Bottom Layer w10: v1(410,980.94) 461,929.94 569,929.94 880,1240.94 v1(880,1660) ; v1(1433.62,980.94) 1484.62,929.94 1592.62,929.94 1903.62,1240.94 v1(1903.62,1660)
REED1: pad.3@70,930 R3.1 | length 100.5
  Top Layer w10: pad.3@70,930 95.43,904.57 R3.1
REED2: pad.3@70,800.94 R4.1 | length 104.7
  Top Layer w10: pad.3@70,800 105.43,764.57 R4.1
RESET: IC1.29 IC2.29 J1.5 J2.5 R2.1 R14.1 | length 2116.3
  Top Layer w10: v1@480,810 485.75,804.25 IC1.29 ; J1.5 679.06,170 v1(770,260.94) ; v1(750,770) R2.1 ; v1@1503.62,810 1509.37,804.25 IC2.29 ; J2.5 1702.68,170 v1(1793.62,260.94) ; v1(1773.62,770) R14.1
  Bottom Layer w10: v1(485.75,810) 710,810 v1(750,770) 750,570.94 770,550.94 v1(770,260.94) ; v1(1509.37,810) 1733.62,810 v1(1773.62,770) 1773.62,570.94 1793.62,550.94 v1(1793.62,260.94)
RX: IC1.30 IC2.30 pad.0 | length 279.4
  Top Layer w10: IC1.30 517.24,693.7 580,630.94 pad.0@580,620.94 ; IC2.30 1540.87,693.7 1603.62,630.94 pad.0@1603.62,620.94
SCK: IC1.17 IC2.17 J1.3 J2.3 U2.5 U6.5 | length 3371.8
  Top Layer w10: v1(230,1090.94) 230,1040.24 260,1010.24 IC1.17 ; v1(650,260.94) 625.47,236.42 625.47,151.56 651.56,125.47 725.47,125.47 J1.3 ; v1(1253.62,1090.94) 1253.62,1040.24 1283.62,1010.24 IC2.17 ; v1(1673.62,260.94) 1649.09,236.42 1649.09,151.56 1675.18,125.47 1749.09,125.47 J2.3
  Bottom Layer w10: v1(302.76,1301.65) 302.76,1253.7 230,1180.94 v1(230,1090.94) 230,862.66 650,442.66 v1(650,260.94) v1@650,250.94 ; v1(1326.38,1301.65) 1326.38,1253.7 1253.62,1180.94 v1(1253.62,1090.94) 1253.62,862.66 1673.62,442.66 v1(1673.62,260.94) v1@1673.62,250.94
SERVO: IC1.10 IC2.10 R1.1 | length 612.5
  Top Layer w10: v1(530,980.94) 548.74,999.68 IC1.10 ; v1(570,1270.94) R1.1 ; v1(1553.62,980.94) 1572.36,999.68 IC2.10
  Bottom Layer w10: v1(530,980.94) 640,1090.94 640,1200.94 v1(570,1270.94)
SERVO_SIGNAL: pad.3@88.74,393.7 U1.4 | length 1835.8
  Top Layer w10: U1.4 v1(647.4,1661.18)
  Bottom Layer w10: pad.3@88.74,393.7 88.74,629.69 150,690.94 150,932.46 40,1042.46 40,1370.94 100,1430.94 417.16,1430.94 v1(647.4,1661.18)
STAT: IC2.26 U8.1 | length 236.5
  Top Layer w10: U8.1 1360,560.16 1360,625 1414.88,679.88 IC2.26
TX: IC1.31 IC2.31 pad.1@580,670.94 pad.1@1603.62,670.94 | length 165
  Top Layer w10: IC1.31 548.74,692.2 570,670.94 pad.1@580,670.94 ; IC2.31 1572.36,692.2 1593.62,670.94 pad.1@1603.62,670.94
V_BATT: C26.1 IC2.28 R20.1 R21.2 | length 704.4
  Top Layer w10: v1(1453.62,810.94) 1477.87,786.69 IC2.28 ; v1(1733.62,730.94) 1733.62,790.94 1782.68,840 C26.1 R20.1
  Bottom Layer w10: v1(1453.62,810.94) 1493.62,770.94 1693.62,770.94 v1(1733.62,730.94)
VCC: D2.A pad.2 R8.2 | length 2035.4
  Top Layer w10: pad.2@78.74,236.22 84.96,230 120,230 150,200 D2.A ; R8.2 v1(910,980)
  Bottom Layer w10: pad.2 304.02,20.94 890,20.94 914.53,45.47 914.53,975.47 v1(910,980)
VCC_MEAS: C8.1 IC1.28 R8.1 R9.2 | length 704.4
  Top Layer w10: v1(430,810.94) 454.25,786.69 IC1.28 ; v1(710,730.94) 710,790.94 759.06,840 C8.1 R8.1
  Bottom Layer w10: v1(430,810.94) 470,770.94 670,770.94 v1(710,730.94)
pads on no net: IC1.1 IC1.2 IC1.22 IC1.25 IC1.26 IC1.27 IC2.1 IC2.2 IC2.22 IC2.27 U2.9 U3.7 U3.8 U5.1 U6.9 U7.7 U7.8

## Keep-outs
Keep-Out Layer:
  lines w10: 1968.5,39.37 1968.5,1929.13 ; 0,0 0,1968.5 1968.5,1968.5 1968.5,0 0,0 ; 944.88,39.37 1023.62,39.37 1023.62,1929.13 944.88,1929.13 944.88,39.37

## Silkscreen, mask and mechanical layers (free items; w line width, h text height)
Bottom Overlay:
  lines w10: 125.16,865.16 589.84,865.16 ; 145,75 525,75 ; 145,235 525,235 ; 145,395 525,395 ; 1160,430 1160,210 1110,160 1045,160 1045,430 1520,430 ; 1235,600 1925,600 ; 1355,300 1355,180 ; 1355,305 1485,305 ; 1605,185 1605,30 1375,30 1375,180 1605,180 1605,315 1955,315 ; 1355,180 1160,180 1120,140 1120,30 1355,30 1355,180 ; 15,750 125,750 125,985 15,985 15,750 ; 1045,495 1045,795 1235,795 1235,490 1050,490 1045,495
  text "REED" at 580,880 h59.06
  text "s" at 1220,710 h59.06
  text "HALL SENSOR" at 1920,625 h59.06
  text "-" at 1218.62,610.94 h59.06
  text "+" at 1220,510 h59.06
  text "REED" at 1505,450 h59.06
  text "SIGNAL" at 520,410 h59.06
  text "CHARGER" at 1955,330 h59.06
  text "LIPO" at 1480,325 h59.06
  text "VCC" at 520,250 h59.06
  text "+" at 1190,120 h59.06
  text "+" at 1575,120 h59.06
  text "-" at 1328.62,115.94 h59.06
  text "-" at 1438.62,115.94 h59.06
  text "GND" at 520,90 h59.06